# Altium PCB PCB1.PcbDoc
Units mil, origin at the board's own origin, x right, y up, seen from the top; angles counter-clockwise.
Board outline 905.51 x 1850.39 mil, 2 copper layers (Top Layer, Bottom Layer); 18 components, 23 nets, 74 pads, 43 vias.
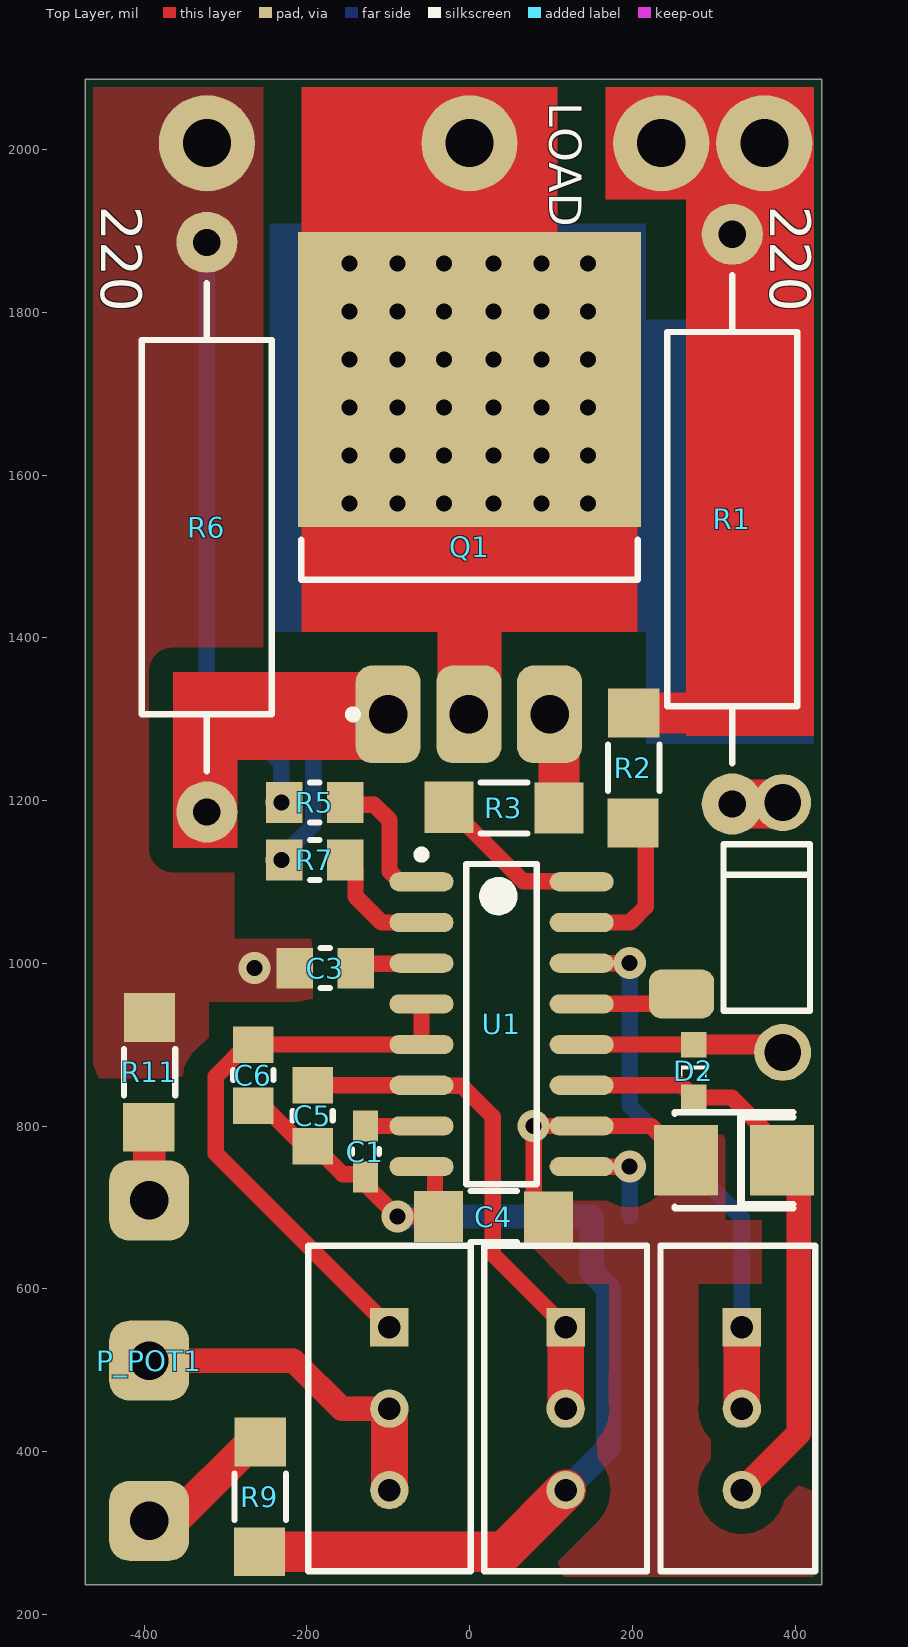
[diagram p0: Top Layer view]
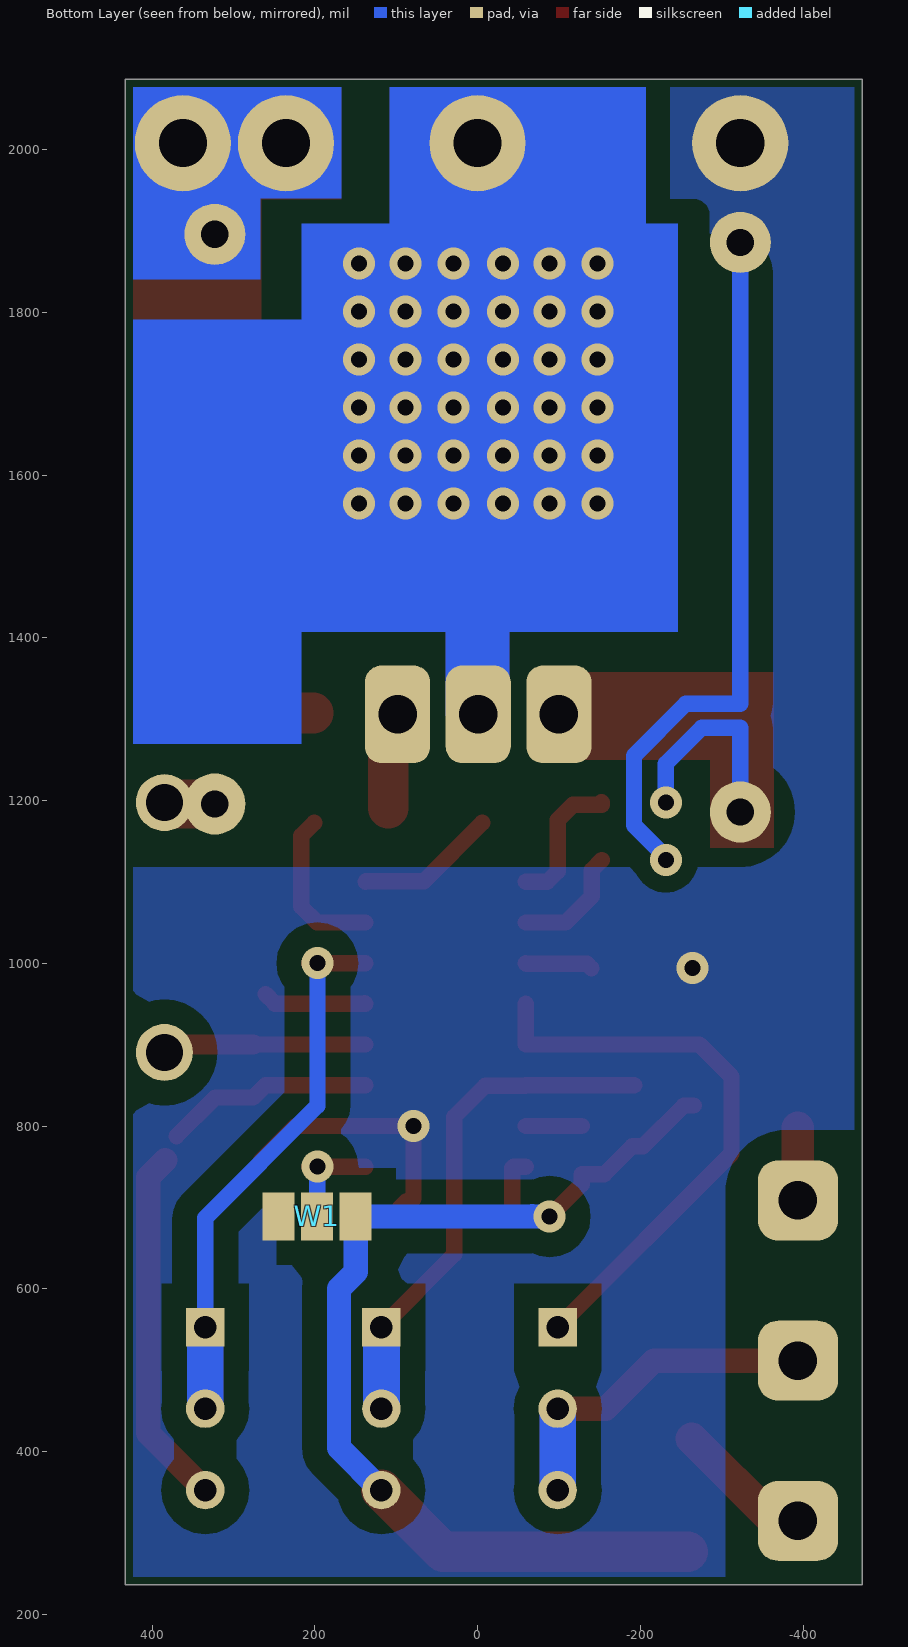
[diagram p1: Bottom Layer view, seen from below]
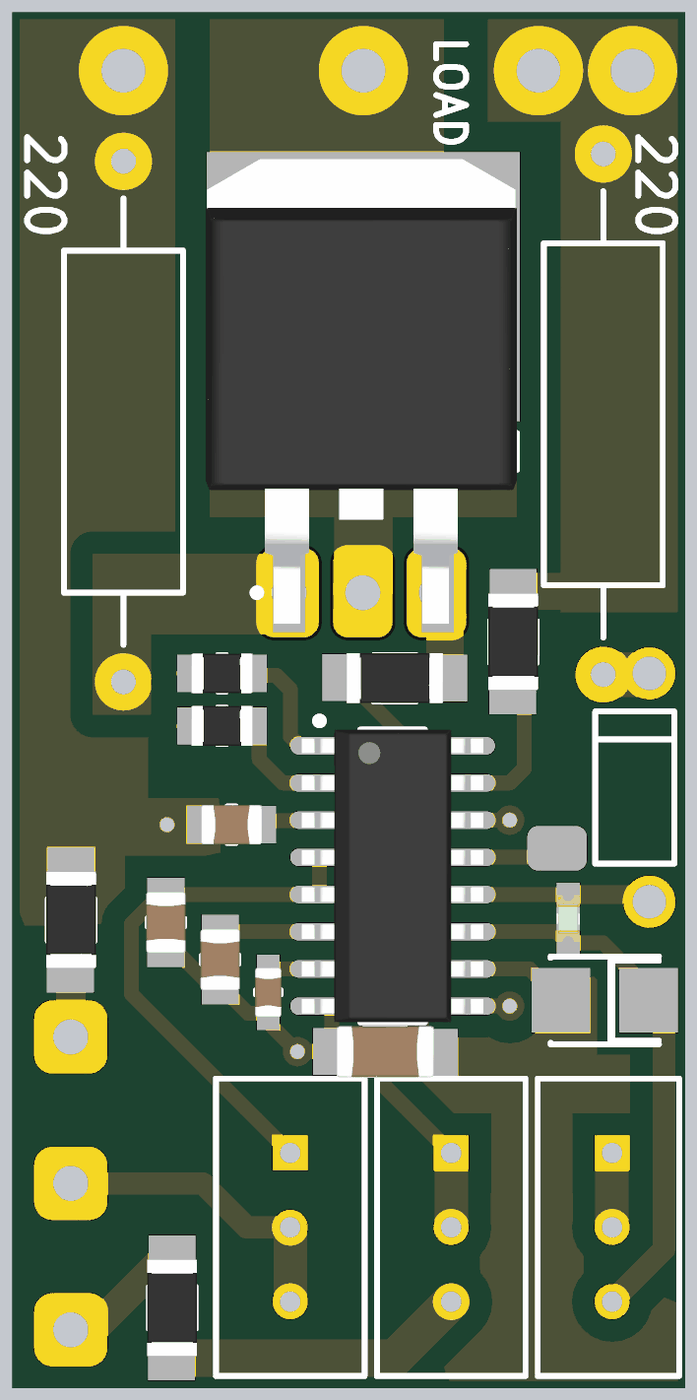
[diagram p2: 3D render of the assembled board from above, using the file's embedded part models]

## Layer stack, top to bottom
Top Solder: solder mask 0.4, Solder Resist, Dk 3.5
Top Layer: signal copper 1.4
Dielectric 1: dielectric 12.6, FR-4, Dk 4.8
Bottom Layer: signal copper 1.4
Bottom Solder: solder mask 0.4, Solder Resist, Dk 3.5

## Board outline
-472.44,236.22 433.07,236.22 433.07,2086.61 -472.44,2086.61

## Design rules (kind name [scope] priority, off if disabled: settings)
Clearance [All] p1: gap=5 ignorepadtopadclearanceinfootprint=FALSE except(30: Arc-Poly Track-Poly SMDPad-Poly THPad-Poly Via-Poly Fill-Poly Poly-Poly)
ComponentClearance [All] p1 off: gap=10 collisioncheckmode=3 verticalgap=10 showdistances=FALSE
MinimumSolderMaskSliver [All] p1 off: minsoldermaskwidth=10
PlaneConnect [All] p1: planeconnectstyle=Direct reliefexpansion=20 reliefentries=4 reliefconductorwidth=10 reliefairgap=10
PolygonConnect [All] p1: connectstyle=Direct reliefconductorwidth=10 reliefentries=4 polygonreliefangle="90 Angle" airgapwidth=10
RoutingVias [All] p1: holewidth=28 width=50 viastyle="Through Hole" minholewidth=0 minwidth=0 maxholewidth=196.85 maxwidth=196.85
SilkToSilkClearance [All] p1 off: silktosilkclearance=10
SilkToSolderMaskClearance [IsPad] p1 off: minsilkscreentomaskgap=10 clearancetoexposedcopper=TRUE
SolderMaskExpansion [All] p1: expansion=4
Width [All] p1: maxlimit=19685.04 minlimit=10 preferedwidth=10
25 further rules are at their usual default settings.

## Components (designator, comment, footprint, x,y, rotation, side; value= is the part's Value field where it differs from the comment)
C1 "100nF 100V" RC_0603 -127.97,768.71 r90 top value="CAP CER 0.1UF 100V X7R 0805"
C3 "100nF 100V" RC_0805_T1.1 -177.39,994.09 r0 top value="CAP CER 0.1UF 100V X7R 0805"
C4 "100nF 100V" RC_1206_T0.95 29.51,688.98 r180 top value="CAP CER 0.1UF 100V X7R 0805"
C5 "100nF 100V" RC_0805_T1.1 -192.69,812.71 r90 top value="CAP CER 0.1UF 100V X7R 0805"
C6 "100nF 100V" RC_0805_T1.1 -265.75,862.71 r270 top value="CAP CER 0.1UF 100V X7R 0805"
D2 "GREEN" RR_LED-0603-GREEN 275.59,867.73 r90 top value="LED GREEN CLEAR 0603 SMD"
P_POT1 "Header 3" R_POT_16K1 -393.7,511.81 r90 top
Q1 "Triac" RR_D2PAK 0,1575.69 r90 top
R1 "Res1" AXIAL-0.7 322.83,1545.84 r90 top value=1K
R2 "20k 0.1%" RR_1206 201.82,1240.16 r90 top value="RES SMD 20K OHM 0.1% 1/4W 1206"
R3 "180" RR_1206 42.33,1190.94 r0 top value="RES SMD 20K OHM 0.1% 1/4W 1206"
R5 "3k3" RR_0805 -190.19,1197.57 r0 top value="RES SMD 20K OHM 0.1% 1/4W 1206"
R6 "Res1" AXIAL-0.7 -322.83,1536 r90 top value=1K
R7 "3k3" RR_0805 -190.19,1126.93 r180 top value="RES SMD 20K OHM 0.1% 1/4W 1206"
R9 "3k3" RR_1206 -257.17,344.49 r90 top value="RES SMD 20K OHM 0.1% 1/4W 1206"
R11 "3k3" RR_1206 -393.21,866.14 r90 top value="RES SMD 20K OHM 0.1% 1/4W 1206"
U1 "UC2010" RR_SO16 39.35,925.21 r0 top
W1 "Jumper" JUMPER-2pos 197.18,688.97 r0 bottom

## Footprints (in the part's own frame and the unit in brackets; to place one, negate y for a bottom-side part, rotate by r counter-clockwise, add the part's x,y. Pads: shape width x height; smd on the part's side, far side on the other; paste and mask are expansions set on the pad)
AXIAL-0.7 [mm] "Axial Device, Thru-Hole; 2 Leads; 0.7 in Pin Spacing"
  round 1.905 hole 0.85 paste+0 mask+0.025: 1(-8.89,0) 2(8.89,0)
  silkscreen extent -7.62,-2.03 7.62,2.03
JUMPER-2pos [mm]
  rect 1x1.5 smd paste+0 mask+0.025: 1(-1.2,0) 2(0,0) 3(1.2,0)
R_POT_16K1 [mm]
  rrect50% 2.5x2.5 hole 1.2 paste+0 mask+0.025: 1(-5,0) 2(0,0) 3(5,0)
RC_0603 [mil] "Chip Capacitor"
  rect 38x31 smd paste+0 mask+1: 1(-31.5,0) 2(31.5,0)
  silkscreen extent -3,-17 3,17, body extent -33,-18 33,18, height 35
RC_0805_T1.1 [mil] "Chip Capacitor"
  rect 45x50 smd paste+0 mask+1: 1(-37.5,0) 2(37.5,0)
  silkscreen extent -6,-25 6,25, body extent -41,-27 41,27, height 45
RC_1206_T0.95 [mil] "Chip Capacitor"
  rect 60x63 smd paste+0 mask+1: 1(-67.5,0.98) 2(67.5,0)
  silkscreen extent -29,-31 29,31, body extent -66,-34 66,34, height 39
RR_0805 [mil] "Chip Resistor; Body 1.6 x 0.8 mm (LxW typ)"
  rect 45x50 smd paste+0 mask+1: 1(-37.5,0) 2(37.5,0)
  silkscreen extent -6,-25 6,25, body extent -41,-27 41,27, height 24
RR_1206 [mil] "Chip Resistor; Body 1.6 x 0.8 mm (LxW typ)"
  rect 60x63 smd paste+0 mask+1: 1(-67.5,0.98) 2(67.5,0)
  silkscreen extent -29,-31 29,31, body extent -65,-33 65,33, height 26
RR_D2PAK [mm] "D2-PAK, 4-Leads, Body 8.8x10.4mm, Pitch 2.54mm, Lead Span 15.1mm, IPC Low Density"
  rect 2.7x1.1 smd paste+0 mask+0.025: 1(-6.85,2.54) 3(-6.85,-2.54)
  rect 9.2x10.7 smd paste+0 mask+0.025: 2(3.6,0)
  silkscreen extent -6.97,-5.25 -1.4,5.25, body extent -7.9,-5.25 7.95,5.39, height 4.8
RR_LED-0603-GREEN [mm]
  rect 0.8x0.8 smd paste+0 mask+0.025: 1(-0.825,0) 2(0.825,0)
  silkscreen extent -0.2,-0.4 0.18,0.4, body extent -0.8,-0.4 0.8,0.4, height 0.6
RR_SO16 [mm] "SOIC, 16-Leads, Body 9.9x3.8mm, Pitch 1.27mm, IPC Medium Density"
  oval 2x0.6 smd paste+0 mask+0.025: 1(-2.5,4.445) 2(-2.5,3.175) 3(-2.5,1.905) 4(-2.5,0.635) 5(-2.5,-0.635) 6(-2.5,-1.905) 7(-2.5,-3.175) 8(-2.5,-4.445) 9(2.5,-4.445) 10(2.5,-3.175) 11(2.5,-1.905) 12(2.5,-0.635) 13(2.5,0.635) 14(2.5,1.905) 15(2.5,3.175) 16(2.5,4.445)
  silkscreen extent -2.62,-5 1.1,5.42, body extent -3.1,-5 3.1,5, height 1.75

## Part data
C1 C3 C4 C5 C6: library part CAP-0805-104-100V, "CAPACITOR CHIP", Manufacturer="AVX Corporation", Package=0805, Cost=0,29, Order number=C0805C104K1RACTU
D2: library part LED-0603-GREEN, "DIODE LED 0603 GREEN", Manufacturer="Wurth Electronics Inc.", Package=0603, Cost=0,14, Order number=150060GS75000
P_POT1: "Header, 3-Pin", LatestRevisionDate=17-Jul-2002, LatestRevisionNote="Re-released for DXP Platform.", Publisher="Altium Limited"
Q1: "Silicon Bidirectional Triode Thyristor", ComponentLink1Description="Manufacturer Link", ComponentLink1URL=http://www.motorola.com/, DatasheetVersion=1999, LatestRevisionDate=17-Jul-2002, LatestRevisionNote="Re-released for DXP Platform.", Note="Pin 2 is electrically connected to Pin 4 (TAB)", PackageDescription="TO, Thru-Hole, Vertical, Heatsink Mounted; 3 In-Line Leads; Pitch 2.28 mm", PackageReference=369-03, Published=29-Sep-2000, Publisher="Altium Limited"
R1 R6: "Resistor", LatestRevisionDate=17-Jul-2002, LatestRevisionNote="Re-released for DXP Platform.", PackageDescription="Axial Device, Thru-Hole; 2 Leads; 0.3 in Pin Spacing", PackageReference=AXIAL-0.3, Published=8-Jun-2000, Publisher="Altium Limited"
R2 R3 R5 R7 R9 R11: library part RES-1206-20K-0.1%, "RESISTOR", Manufacturer=Susumu, Package=1206, Cost=0,68, Order number=RG3216P-2002-B-T1
W1: library part "Header 3", "Header, 3-Pin"

## Free pads (board coordinates)
  rect 47.24x47.24 hole 27.56 paste+0 mask+1: 1(-98.43,552.77) 1(118.11,552.77) 1(334.63,552.77)
  rect 78.74x86.61 smd paste+0 mask+1: 1(383.86,757.87) 2(265.75,757.87)
  round 70 hole 45.28 paste+0 mask+1: 1(384.84,890.48) 2(384.84,1197.57)
  round 47.24 hole 27.56 paste+0 mask+1: 2(-98.43,452.77) 2(118.11,452.77) 2(334.63,452.77) 3(-98.43,352.77) 3(118.11,352.77) 3(334.63,352.77)
  round 118.11 hole 59.06 paste+0 mask+1: 2(362.2,2007.87) 3(235.59,2007.87) 4(0,2007.87) 5(-322.83,2007.87)
  rrect50% 80x60 smd paste+0 mask+1: 6(260.63,962.37)
  rrect50% 80x120 hole 47.24: 8(-100,1306) 8(-0.83,1305.98) 8(98.34,1305.98)

## Via types
v1: diameter 39.37, hole 19.68, Top Layer to Bottom Layer, tented bottom, 36 vias
v2: diameter 39.37, hole 19.68, Top Layer to Bottom Layer, tented both sides, 7 vias

## Nets (pads, with @x,y where several pads share a name; then routed paths per layer and width w, separated by ;. In a path a pad name is that pad's centre, name@x,y a point inside that pad or via, vN(x,y) a via of type N, cw(c..) or ccw(c..) an arc to the next point about the centre after c; other vN are vias at no path point)
LINE1: pad.2@362.2,2007.87 pad.3@235.59,2007.87 R1.2 R2.2 | length 113.7
  Top Layer w20: 313.56,1307.66 314.96,1309.06
  Top Layer w50: R2.2 313.56,1307.66
LINE2: C3.1 C4.1 pad.2@265.75,757.87 pad.5 R6.2 R7.2 R11.2 U1.10 W1.3 | length 1159.7
  Top Layer w20: C4.1@106.85,687.99 86.85,707.99 81.58,707.99 78.74,710.83 78.74,792.35 86.6,800.21 U1.10 223.41,800.21 pad.2@265.75,757.87
  Bottom Layer w20: R6.2@-322.83,1850.39 -322.83,1318.9 -255.91,1318.9 -192.2,1255.19 -192.2,1169.89 -231.37,1130.72 v2(-231.37,1127.1)
  other v2: 78.74,800.21 -264.11,994.09
LOAD: pad.4 pad.8@-0.83,1305.98 Q1.2
  other v1: -147.64,1564.96 -88.58,1564.96 -31.51,1564.96 29.53,1564.96 88.58,1564.96 145.65,1564.96 -147.64,1624.02 -88.58,1624.02 -31.51,1624.02 29.53,1624.02 88.58,1624.02 145.65,1624.02 -147.64,1683.07 -88.58,1683.07 -31.51,1683.07 29.53,1683.07 88.58,1683.07 145.65,1683.07 -147.64,1742.13 -88.58,1742.13 -31.51,1742.13 29.53,1742.13 88.58,1742.13 145.65,1742.13 -147.64,1801.18 -88.58,1801.18 -31.51,1801.18 29.53,1801.18 88.58,1801.18 145.65,1801.18 -147.64,1860.24 -88.58,1860.24 -31.51,1860.24 29.53,1860.24 88.58,1860.24 145.65,1860.24
NetC1_2: C1.2 U1.7 | length 68.9
  Top Layer w20: C1.2 U1.7
NetC2_1: D2.1 pad.1@383.86,757.87 pad.3@334.63,352.77 U1.11 | length 700.9
  Top Layer w20: U1.11 260.63,850.21 D2.1 322.23,835.25 pad.1@370.08,787.4
  Top Layer w30: pad.3@334.63,352.77 404.53,422.67 404.53,737.2 pad.1@383.86,757.87
NetC3_2: C3.2 U1.3 | length 83.4
  Top Layer w20: C3.2 -134.47,999.52 -59.76,999.52 U1.3
NetC5_2: C5.2 pad.1@118.11,552.77 pad.2@118.11,452.77 U1.6 | length 733.1
  Top Layer w20: C5.2 U1.6 -58.38,849.52 -9.54,849.52 28.54,811.44 28.54,642.34 pad.1@118.11,552.77
  Top Layer w45: pad.2@118.11,452.77 pad.1@118.11,552.77
  Bottom Layer w45: pad.2@118.11,452.77 pad.1@118.11,552.77
NetC6_1: C6.1 pad.1@-98.43,552.77 U1.4 U1.5 | length 715.9
  Top Layer w20: pad.1@-98.43,552.77 -312.01,766.35 -312.01,861 -272.8,900.21 C6.1 U1.5 U1.4
NetD1_1: D2.2 pad.1@384.84,890.48 U1.12 | length 250.4
  Top Layer w20: U1.12 D2.2
  Top Layer w25: D2.2 pad.1@376.7,900.21 ; pad.1@376.7,888.78 pad.1@384.84,880.64
NetD1_2: pad.2@384.84,1197.57 R1.1 | length 62.7
  Top Layer w50: R1.1 R1.1@324.56,1197.57
  Top Layer w60: R1.1@324.56,1195.84 pad.2@384.84,1195.84
NetP_POT1_1: P_POT1.1 R9.2 | length 172
  Top Layer w40: P_POT1.1 -364.17,314.96 R9.2@-263.43,415.7
NetP_POT1_2: P_POT1.2 pad.2@-98.43,452.77 pad.3@-98.43,352.77 | length 527.9
  Top Layer w30: P_POT1.2@-393.7,531.5 -374.02,511.81 -216.33,511.81 -157.29,452.77 pad.2@-98.43,452.77
  Top Layer w45: pad.3@-98.43,352.77 pad.2@-98.43,452.77
  Bottom Layer w45: pad.3@-98.43,352.77 pad.2@-98.43,452.77
NetP_POT1_3: P_POT1.3 R11.1 | length 90.2
  Top Layer w20: R11.1 R11.1@-393.7,798.15
  Top Layer w40: P_POT1.3 R11.1@-393.7,798.15
NetQ1_1: pad.8@-100,1306 Q1.1 R5.1 R6.1 | length 260.6
  Bottom Layer w20: R6.1 -322.83,1289.37 -275.59,1289.37 -231.36,1245.14 v2(-231.36,1197.74)
NetQ1_3: pad.8@98.34,1305.98 Q1.3 R3.2 | length 128.2
  Top Layer w20: Q1.3@98.34,1307.66 Q1.3@109.83,1307.66
  Top Layer w50: R3.2 Q1.3@109.83,1307.66
NetR2_1: R2.1 U1.15 | length 196.4
  Top Layer w20: U1.15 197.18,1050.21 216.54,1069.57 216.54,1156.96 R2.1
NetR3_1: R3.1 U1.16 | length 173.7
  Top Layer w20: R3.1@-5.9,1172.66 65.85,1100.91 137.09,1100.91 U1.16
NetR4_1: pad.1@334.63,552.77 pad.2@334.63,452.77 U1.14 | length 773.4
  Top Layer w20: U1.14 v2(196.83,1000.21) v2@206.68,1000.21
  Top Layer w45: pad.2@334.63,452.77 pad.1@334.63,552.77
  Bottom Layer w20: v2(196.83,1000.21) 196.83,824.82 334.63,687.02 pad.1@334.63,552.77
  Bottom Layer w45: pad.2@334.63,452.77 pad.1@334.63,552.77
NetR5_2: R5.2 U1.1 | length 173.6
  Top Layer w20: R5.2@-152.27,1197.99 R5.2 -152.69,1195.07 -117.35,1195.07 -98.43,1176.14 -98.43,1112.99 -85.65,1100.21 U1.1 U1.1@-59.49,1100.64
NetR7_1: R7.1 U1.2 | length 144.3
  Top Layer w20: R7.1 -140.19,1114.43 -140.19,1082.12 -108.28,1050.21 U1.2
NetU1_9: U1.9 W1.2 | length 130.3
  Top Layer w20: U1.9 v2(196.83,750.21) v2@206.68,750.21
  Bottom Layer w20: v2(196.83,750.21) 197.01,750.04 197.01,689.14 W1.2
OL: pad.6 U1.13 | length 127.9
  Top Layer w20: U1.13 U1.13@138.47,950.91 ; U1.13@138.47,950.21 pad.6@249.16,950.21 ; pad.6@249.16,950.91 pad.6
Vref: C1.1 C4.2 C5.1 C6.2 pad.3@118.11,352.77 R9.1 U1.8 W1.1 | length 1370.6
  Top Layer w20: C6.2 -253.36,825.21 -203.36,775.21 C5.1 -190.19,775.21 -155.69,740.71 -127.97,740.71 C1.1 -127.97,728.36 -88.75,689.14 -78.74,689.14 -37.99,689.14 C4.2@-28.15,689.14 ; U1.8 -44.18,750.21 -42.5,748.54 C4.2@-42.5,700.53
  Top Layer w50: R9.1 42.33,276.99 pad.3@118.11,352.77
  Bottom Layer w30: v2@-80,688.97 W1.1 149.93,620.78 170.32,600.39 170.32,404.98 pad.3@118.11,352.77 ; -67.1,689.14 -66.93,688.97
  other v2: -88.58,688.98

## Polygon pours and split planes (outlines as drawn)
LINE2 on Bottom Layer (solid, remove dead copper, pour order 2): -462.6,2076.77 -462.6,246.06 423.23,246.06 423.23,2076.77
LINE2 on Top Layer (solid, remove dead copper, pour order 0): -462.6,2076.77 -462.6,246.06 423.23,246.06 423.23,2076.77

## Other copper
Top Layer:
  rectangle net LOAD: -39.37,1304.13 39.37,1515.75
  rectangle net LOAD: -206.69,1407.48 206.68,1545.28
  rectangle net NetQ1_1: -364.17,1141.73 -285.43,1259.84
  rectangle net NetQ1_1: -364.17,1250 -78.74,1358.27
  rectangle net LINE1: 265.75,1279.53 423.23,1948.82
  rectangle net LINE1: 167.32,1938.98 423.23,2076.77
  rectangle net LOAD: -206.69,1536 108.27,2076.77
  pour cut-out: -289.26,1230.32 -289.26,1030.04 -193.91,1030.04 -193.91,1230.32
  pour cut-out: -253.36,2106.3 -253.36,1358.27 -151.65,1358.27 -151.65,2106.3
Bottom Layer:
  rectangle net LOAD: -39.37,1304.13 39.37,1515.75
  rectangle net LOAD: 216.54,1269.68 423.23,1476.38
  rectangle net LINE1: 266.44,1840.55 423.23,1948.82
  rectangle net LINE1: 167.32,1939.71 423.23,2076.77
  rectangle net LOAD: -242.83,1407.48 423.23,1791.34
  rectangle net LOAD: -206.69,1899.61 108.27,2076.77
  rectangle net LOAD: -246.06,1407.48 216.54,1909.45
  pour cut-out: -264.74,1939.71 ccw(c-264.74,1919.29) -285.15,1919.29 -285.15,1186 -322.83,1186 -322.83,1118.17 482.28,1118.17 482.28,1939.71
  pour cut-out: -472.44,795.49 -381.25,795.49 cw(c-381.25,718.5) -304.26,718.5 -304.26,236.22 -472.44,236.22
  pour cut-out: 255.01,2086.61 255.01,1195.84 ccw(c322.83,1195.84) 322.83,1128.02 472.44,1128.02 472.44,2086.61

## Silkscreen, mask and mechanical layers (free items; w line width, h text height)
Top Overlay:
  lines w7.87: 251.97,700.79 251.97,698.82 397.64,698.82 ; 251.97,814.96 251.97,816.93 397.64,816.93 ; 312.01,1109.03 418.31,1109.03 ; 333.66,703.74 397.64,703.74 ; 333.66,811.02 397.64,811.02 ; -198.43,252.77 1.57,252.77 1.57,652.77 -198.43,652.77 -198.43,252.77 ; 18.11,252.77 218.11,252.77 218.11,652.77 18.11,652.77 18.11,252.77 ; 234.63,252.77 424.79,252.77 424.79,652.77 234.63,652.77 234.63,252.77 ; 312.01,941.67 418.31,941.67 418.31,1146.39 312.01,1146.39 312.01,941.67
  lines w10: 333.66,703.74 333.66,811.02
  text "LOAD" at 97.72,2058.32 h40 r270
  text "220" at -452.76,1930.86 h50 r270
  text "220" at 369.38,1930.86 h50 r270
Mechanical 1:
  the board outline again, w10
Mechanical 13:
  lines w3.94: 338.63,1109.97 431.1,1109.97 ; 338.6,951.51 431.08,951.51 431.08,1136.55 338.6,1136.55 338.6,951.51
  lines w5.91: 372.05,758.86 395.67,758.86 ; 383.86,747.05 383.86,770.67
  lines w7.87: 253.94,698.82 253.94,816.93 411.42,816.93 411.42,698.82 253.94,698.82
  text ".Designator" at 401.89,962.37 h40 r90
Mechanical 15:
  lines w1.97: 327.76,854.07 327.76,1233.99 441.93,1233.99 441.93,854.07 327.76,854.07
  lines w3.94: 365.16,1044.03 404.53,1044.03 ; 384.84,1024.34 384.84,1063.71